# Altium PCB CAN_Optical.PcbDoc (part 2 of 2)
Units mm, origin at the board's own origin, x right, y up, seen from the top; angles counter-clockwise.
Board outline 152.4 x 127 mm, 4 copper layers (Top Layer, Power Plane, Ground Plane, Bottom Layer), stack 0.603 mm thick; 133 components, 52 nets, 740 pads, 182 vias.
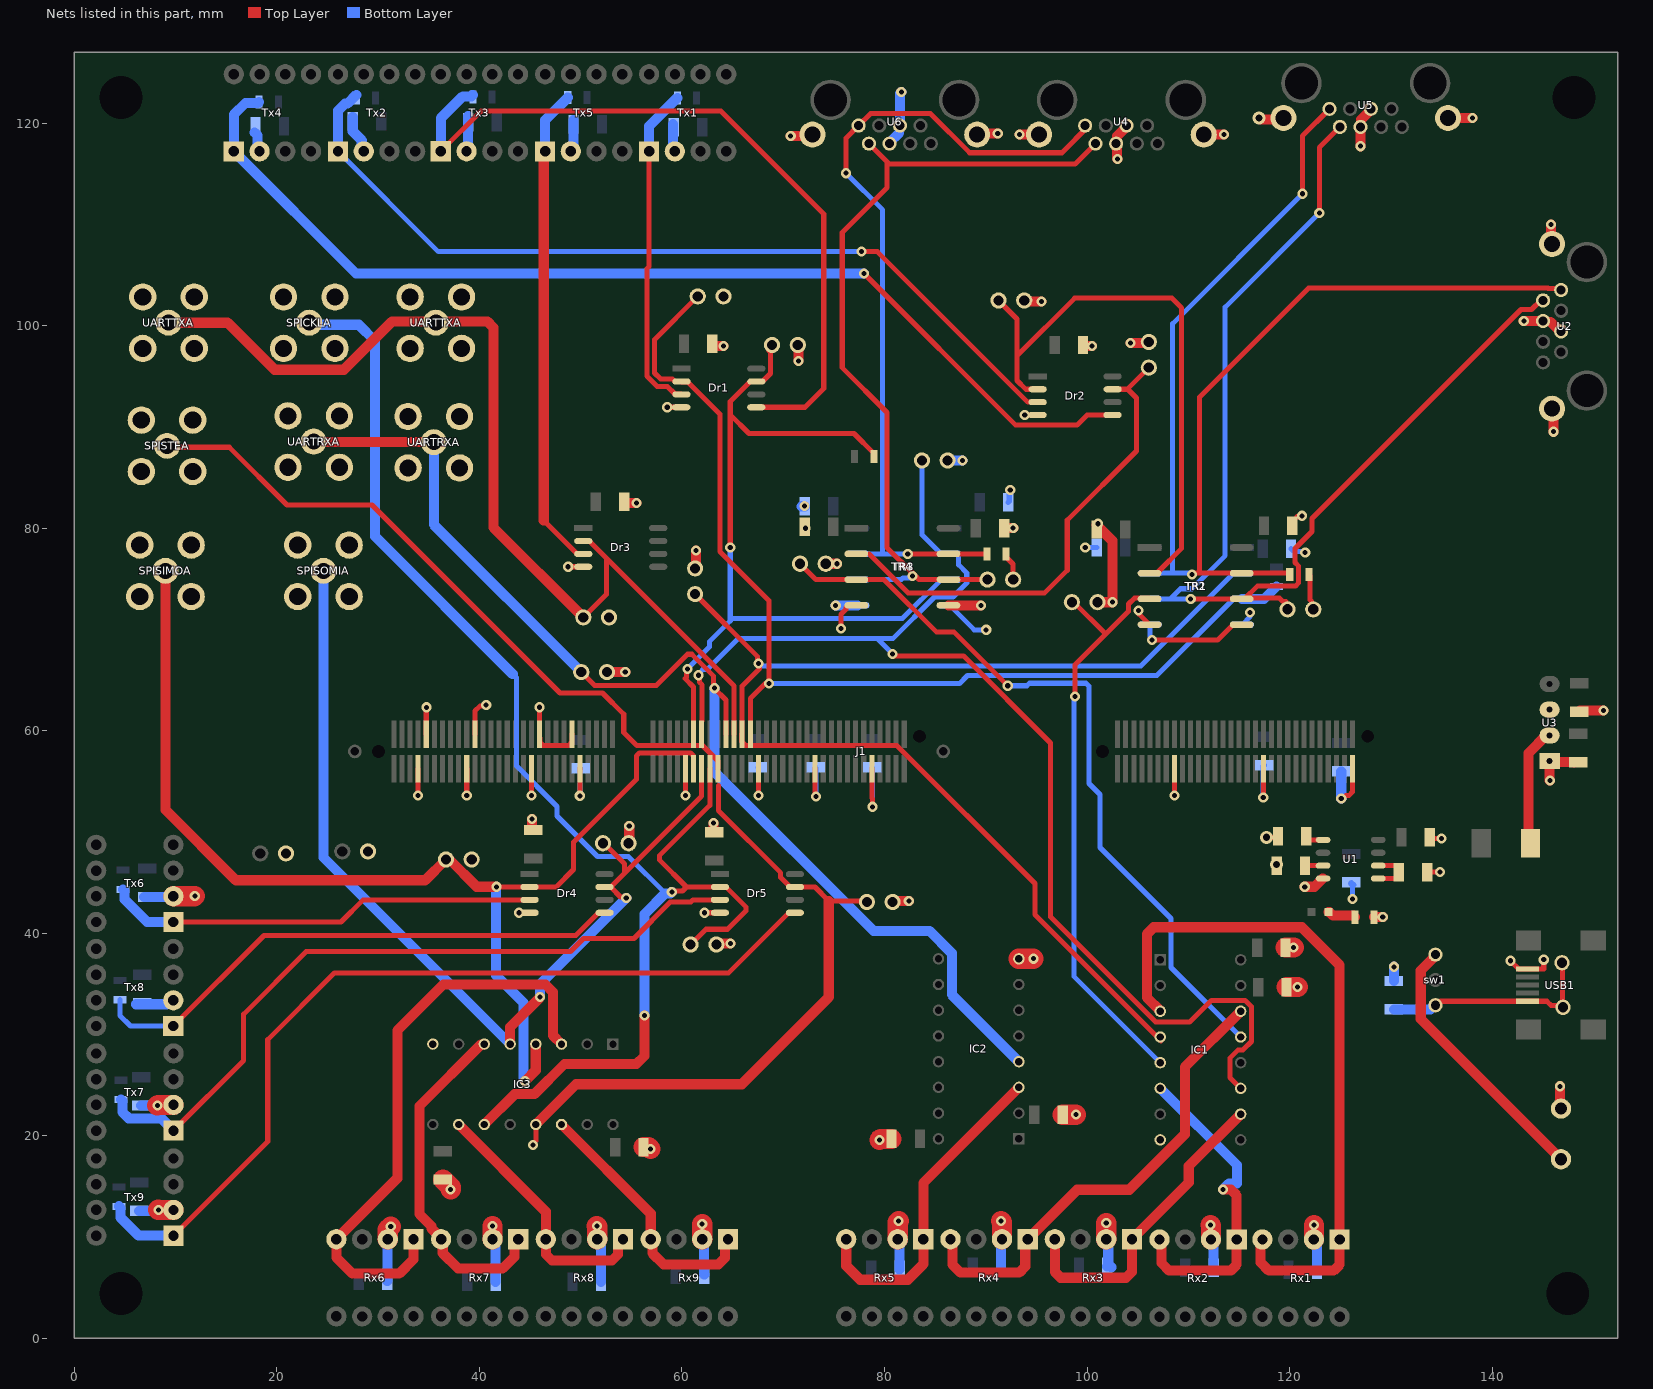
[diagram p4: the nets of this part, all layers, seen from the top]

## Via types
v1: diameter 1, hole 0.5, Top Layer to Bottom Layer, 179 vias
v2: diameter 1.27, hole 0.711, Top Layer to Bottom Layer, 3 vias

## Nets (pads, with @x,y where several pads share a name; then routed paths per layer and width w, separated by ;. In a path a pad name is that pad's centre, name@x,y a point inside that pad or via, vN(x,y) a via of type N, cw(c..) or ccw(c..) an arc to the next point about the centre after c; other vN are vias at no path point) (continued)
GND: C2.2 C4.2 C5.2 C6.2 C7.2 C8.2 C9.2 C10.2 C11.2 C12.2 C13.2 C14.2 C15.2 C16.2 C17.2 C19.2 C20.2 C21.2 C22.2 C23.2 C24.2 C26.2 C27.2 C28.2 C30.2 C31.2 C32.2 C33.2 C34.2 C35.2 C36.2 C37.2 C38.2 C39.2 C40.2 C41.2 C42.2 C43.2 C44.2 C45.2 C46.2 C47.2 C48.2 C49.2 C50.2 C51.2 CLKA.2 CON1.2 DACA.2 DACB.2 Dr1.4 Dr2.4 Dr3.4 Dr4.4 Dr5.4 IC1.8 IC2.8 IC3.8 J1.7 J1.10 J1.19 J1.22 J1.35 J1.38 J1.46 J1.47 J1.65 J1.83 J1.97 J1.111 J1.135 J1.157 J1.179 R2.1 Rx1.2 Rx2.2 Rx3.2 Rx4.2 Rx5.2 Rx6.2 Rx7.2 Rx8.2 Rx9.2 RXA.2 RXB.2 SHRXA.2 SHRXB.2 SHTXA.2 SHTXB.2 SIMO.2 SOMI.2 SPICKLA.2 SPISIMOA.2 SPISOMIA.2 SPISTEA.2 STEA.2 TR1.4 TR2.4 TR3.4 TR4.4 Tx1.2 Tx2.2 Tx3.2 Tx4.2 Tx5.2 Tx6.2 Tx7.2 Tx8.2 Tx9.2 TXA.2 TXB.2 U1.4 U3.1 UARTRXA.2 UARTTXA.2 USB1.5 | length 226
  Top Layer w0.5: v1(33.952,53.621) J1.7@33.952,56.261 ; J1.10@34.752,59.661 34.752,62.301 v1(34.776,62.325) ; Tx3.2@38.735,117.348 Tx3.2@38.74,117.343 ; v1(38.752,53.621) J1.19@38.752,56.261 ; J1.22@39.552,59.661 39.552,61.948 40.044,62.44 40.577,62.44 v1(40.672,62.536) ; v1(43.904,42.037) Dr4.4@44.958,42.037 ; v1(45.152,53.621) J1.35@45.152,56.261 ; v1(45.926,62.327) 45.952,62.301 J1.38@45.952,59.661 45.952,59.311 45.998,59.265 45.998,58.852 46.293,58.557 48.811,58.557 49.152,58.898 J1.46@49.152,59.661 ; v1(48.768,76.2) Dr3.4@50.258,76.2 ; v1(49.915,53.584) 49.952,53.621 J1.47@49.952,56.261 ; v1(58.547,91.948) Dr1.4@59.944,91.948 ; v1(60.352,53.621) J1.65@60.352,56.261 ; v1(62.23,42.037) Dr5.4@63.754,42.037 ; v1(67.552,53.621) J1.83@67.552,56.261 ; C28.2@72.136,80.137 72.009,80.01 72.2,79.819 v1(72.2,80) ; J1.97@73.152,56.261 73.152,53.737 73.254,53.635 v1(73.254,53.5) ; v1(75.692,70.104) 75.692,71.478 76.188,71.974 76.188,72.171 76.407,72.39 TR4.4@77.216,72.39 ; J1.111@78.752,56.261 78.752,53.348 78.8,53.3 v1(78.8,52.5) ; v1(93.853,91.186) Dr2.4@95.123,91.186 ; v1(105.1,71.9) 105.1,71.557 TR2.4@106.172,70.485 ; v1(108.62,53.621) J1.135@108.62,56.261 ; v1(117.4,53.4) 117.42,53.42 J1.157@117.42,56.261 ; v2(117.717,49.482) 118.73,49.482 C4.2@118.857,49.609 ; v1(125.1,53.3) 125.235,53.3 125.568,53.633 125.879,53.633 126.22,53.974 J1.179@126.22,56.261 ; C5.2@133.595,46.053 v1(134.862,46.053) ; C2.2@133.849,49.482 133.976,49.355 v1(134.989,49.355) ; v1(141.8,37.3) 142.6,36.5 USB1.5@143.5,36.5 145.1,36.5 v1(145.1,37.4)
  Top Layer w1: v1(45.2,51.3) 45.2,50.21 45.21,50.2 C45.2@45.3,50.2 ; UARTRXA.2@52.6,65.8 v1(54.4,65.8) ; C37.2@54.3,82.6 54.3,82.51 54.31,82.5 v1(55.5,82.5) ; SOMI.2@54.74,48.9 54.8,48.96 v1(54.8,50.6) ; RXA.2@61.3,76.04 61.4,76.14 v1(61.4,77.8) ; C21.2@63,98.2 63,98.01 63.01,98 v1(64.1,98) ; v1(63.1,50.9) 63.1,50.01 63.11,50 C46.2@63.2,50 ; CLKA.2@63.4,38.9 63.5,39 v1(64.8,39) ; TXB.2@71.44,98.1 71.5,98.04 v1(71.5,96.5) ; SHTXB.2@74.2,76.5 v1(75.3,76.5) ; STEA.2@80.8,43.1 80.9,43.2 v1(82.4,43.2) ; SHRXA.2@93.8,102.5 93.9,102.4 v1(95.5,102.4) ; C22.2@99.6,98.1 99.6,98.01 99.61,98 v1(100.5,98) ; C9.2@100.965,80.311 102.5,78.776 v1(102.5,72.7) SHTXA.2@101.04,72.7 ; v1(104.3,98.3) 106,98.3 SHRXB.2@106.1,98.4 ; v1(121.5,44.6) 122.462,44.6 123.28,45.418 U1.4@123.305,45.418 ; R2.1@128.35,41.6 v1(129.2,41.6) ; v1(145.7,55.1) 145.682,55.118 U3.1@145.682,57.01 145.782,56.91 148.09,56.91 C17.2@148.1,56.9 ; v1(146.7,24.9) 146.7,22.8 CON1.2@146.8,22.7
  Top Layer w2: v1(8.2,23) 8.265,23.065 Tx7.2@9.798,23.065 ; v1(8.3,12.7) 8.31,12.69 Tx9.2@9.798,12.69 ; Tx6.2@9.784,43.663 11.863,43.663 v1(11.9,43.7) ; Rx6.2@30.96,9.8 30.96,10.769 v1(31.245,11.055) ; C19.2@36.4,15.7 37.164,14.936 v1(37.164,14.7) ; Rx7.2@41.3,9.8 v1(41.3,11.1) ; v1(51.6,11.1) 51.64,11.06 Rx8.2@51.64,9.8 ; C20.2@56.2,18.9 56.7,18.9 v1(56.9,18.7) ; Rx9.2@62,9.8 v1(62,11.3) ; v1(79.5,19.6) 79.6,19.7 C38.2@80.7,19.7 ; Rx5.2@81.3,9.8 81.3,11.5 v1(81.4,11.6) ; v1(91.5,11.6) 91.6,11.5 Rx4.2@91.6,9.8 ; IC2.8@93.27,37.49 94.69,37.49 v1(94.7,37.5) ; C43.2@97.6,22.1 v1(98.9,22.1) ; Rx3.2@101.9,9.8 v1(101.9,11.4) ; v1(112.2,11.2) 112.235,11.165 Rx2.2@112.235,9.775 ; C30.2@119.6,38.6 v1(120.4,38.6) ; C31.2@119.7,34.7 v1(120.8,34.7) ; Rx1.2@122.4,9.775 v1(122.4,11.2)
  Bottom Layer w0.5: v1(49.915,53.584) 49.915,56.215 C39.2@50,56.3 ; C33.2@67.5,56.4 67.552,56.348 v1(67.552,53.621) ; C47.2@73.2,56.4 73.254,56.346 v1(73.254,53.5) ; v1(78.8,52.5) C35.2@78.8,56.4 ; TR3.4@86.443,72.39 88.856,69.977 v1(90.043,69.977) ; C27.2@92.205,82.55 92.323,82.668 92.323,83.694 v1(92.418,83.79) ; TR1.4@115.316,70.485 116.1,71.269 v1(116.1,71.7) ; v1(117.4,53.4) 117.4,56.5 C26.2@117.5,56.6 ; C6.2@120.145,77.978 120.145,77.973 120.405,77.713 121.423,77.713 v1(121.543,77.593) ; v1(126.2,43.4) C7.2@126.2,44.733 ; C7.2@126.2,44.734 126,44.935 C7.2@126.099,45.034 C7.2@126.353,44.78
  Bottom Layer w1: C49.2@6.1,33 9.122,33 9.508,33.386 Tx8.2@9.779,33.386 ; C50.2@6.4,12.6 6.41,12.59 8.19,12.59 v1(8.3,12.7) ; C42.2@6.6,23 6.61,23.01 8.19,23.01 v1(8.2,23) ; C41.2@6.9,43.6 C41.2@7.2,43.6 7.21,43.61 9.731,43.61 Tx6.2@9.784,43.663 ; v1@8.2,23.01 9.743,23.01 Tx7.2@9.798,23.065 ; v1@8.3,12.51 9.618,12.51 Tx9.2@9.798,12.69 ; C24.2@17.81,119.08 18.102,118.788 18.102,117.407 Tx4.2@18.293,117.216 ; C10.2@27.5,120.6 C10.2@27.5,120.2 27.5,119.19 28.389,118.301 28.389,117.407 Tx2.2@28.58,117.216 ; C36.2@30.9,5.7 30.91,5.71 30.91,9.75 Rx6.2@30.96,9.8 ; Tx3.2@38.735,117.221 38.89,117.376 38.89,120.69 C23.2@38.9,120.7 ; Rx7.2@41.3,9.8 41.3,9.529 41.6,9.229 C40.2@41.6,5.6 ; Tx5.2@49.027,117.216 49.027,117.487 49.3,117.76 C32.2@49.3,119.9 C32.2@49.3,120.3 ; Rx8.2@51.64,9.8 51.64,9.529 52,9.169 C44.2@52,5.6 ; C16.2@59.1,119.9 59.1,119.6 59.11,119.59 59.11,117.405 Tx1.2@59.299,117.216 ; Rx9.2@62,9.8 62.19,9.61 62.19,6.31 C48.2@62.2,6.3 ; Rx5.2@81.3,9.8 81.49,9.61 81.49,6.81 C34.2@81.5,6.8 ; RXB.2@86.24,86.7 v1(87.7,86.7) ; C14.2@91.5,7.1 91.51,7.11 91.51,9.71 Rx4.2@91.6,9.8 ; Rx3.2@101.9,9.8 102.091,9.609 102.091,7.338 102.4,7.029 102.4,7 102.3,7.1 C13.2@102,7.1 ; Rx2.2@112.235,9.775 112.235,9.504 112.49,9.249 112.49,7.01 C12.2@112.5,7 ; Rx1.2@122.4,9.775 122.4,9.504 122.694,9.21 122.694,6.806 C11.2@122.7,6.8 ; v1(125.1,53.3) C51.2@125.1,56 ; C15.2@130.3,35.3 v1(130.3,36.7)
  other v1: 101.1,80.446
  other v2: 118.7,46.8
GND/1: C1.2 C3.2 C18.2 C25.2 C29.2 TR1.5 TR2.5 TR3.5 TR4.5 U2.4 U2.5 U2.9 U3.3 U4.4 U4.5 U4.9 U5.4 U5.5 U5.9 U6.4 U6.5 U6.9 | length 56
  Top Layer w0.5: v1(106.426,68.961) 112.898,68.961 114.422,70.485 TR2.5@115.272,70.485 ; C3.2@120.272,80.264 120.272,80.664 120.746,81.138 121.129,81.138 v1(121.225,81.234)
  Top Layer w1: v1(70.739,118.745) 72.764,118.745 U6.9@72.892,118.873 ; TR4.5@86.316,72.39 v1(89.535,72.39) ; U6.9@89.152,118.873 89.278,118.999 v1(91.186,118.999) ; C29.2@91.824,80.01 v1(92.71,80.01) ; v1(93.345,118.872) 95.263,118.872 U4.9@95.264,118.871 ; U4.4@102.874,117.981 102.951,117.904 102.951,116.505 v1(102.997,116.459) ; 102.951,118.709 103.894,119.653 U4.5@103.894,119.761 ; U4.9@111.524,118.871 U4.9@111.524,118.871 v1(113.538,118.872) ; v2(116.967,120.523) 117.04,120.523 117.189,120.374 119.246,120.374 U5.9@119.394,120.522 ; v1(127,117.729) 127,119.628 U5.4@127.004,119.632 ; 127.081,120.36 128.024,121.304 U5.5@128.024,121.412 ; U5.9@135.654,120.522 U5.9@135.654,120.522 v1(138.049,120.523) ; v1(143.129,100.457) 145.028,100.457 U2.4@145.032,100.461 ; 145.76,100.384 146.704,99.441 U2.5@146.812,99.441 ; v1(145.796,109.982) 145.796,108.197 U2.9@145.922,108.071 ; U2.9@145.922,91.811 146.05,91.683 v1(146.05,89.535) ; C18.2@148.6,61.9 148.7,62 v1(151,62)
  Bottom Layer w0.5: v1(99.822,78.105) C1.2@100.959,78.105 ; TR1.5@105.337,70.416 105.407,70.485 TR1.5@106.216,70.485 106.216,69.306 106.426,69.096 v1(106.426,68.961)
  Bottom Layer w1: v1(72.1,82.2) 71.862,82.2 71.831,82.169 C25.2@72.13,82.169 ; v1(75.184,72.39) TR3.5@77.343,72.39 ; U6.4@80.502,117.983 80.502,118.091 81.445,119.035 ; U6.5@81.522,119.763 81.522,122.924 v1(81.661,123.063)
NetC4_1: C4.1 U1.1 | length 1.9
  Top Layer w0.5: C4.1@121.657,49.609 121.657,49.488 121.917,49.228 U1.1@123.305,49.228
NetC5_1: C5.1 U1.5 U1.6 | length 5
  Top Layer w0.5: U1.5@128.755,45.418 130.535,45.418 130.795,45.678 C5.1@130.795,46.053 130.795,46.428 130.535,46.688 U1.6@128.755,46.688
NetC8_1: C8.1 U1.3 | length 1.8
  Top Layer w0.5: C8.1@121.53,46.688 U1.3@123.305,46.688
NetC15_1: C15.1 sw1.3 USB1.1 | length 21.7
  Top Layer w0.5: sw1.3@134.4,32.9 134.508,32.9 134.908,33.3 USB1.1@143.5,33.3 145.4,33.3 145.804,32.896 146.804,32.896 USB1.1@146.95,32.75 ; USB1.1@146.9,37.1 146.95,37.05 USB1.1@146.95,32.75 ; USB1.1@147,32.7 USB1.1@146.95,32.75
  Bottom Layer w1: C15.1@130.3,32.5 133.892,32.5 134.292,32.9 sw1.3@134.4,32.9
NetD1_1: D1.1 R2.2 | length 2.8
  Top Layer w1: D1.1@123.825,42.1 123.95,42.1 124.3,41.75 126.3,41.75 R2.2@126.45,41.6
NetDr1_3: Dr1.3 R4.2 Tx1.1 | length 32.9
  Top Layer w0.5: Tx1.1@56.759,117.216 56.759,105.86 56.535,105.636 56.535,95.03 57.565,94 58.562,94 59.311,93.251 59.911,93.251 Dr1.3@59.944,93.218
  Bottom Layer w1: Tx1.1@56.759,117.216 56.766,117.223 56.766,119.716 R4.2@59.55,122.5
NetDr1_5: Dr1.5 R6.2 Tx3.1 | length 75.7
  Top Layer w0.5: Tx3.1@36.195,117.221 40.174,121.2 63.839,121.2 74,111.039 74,93.8 72.148,91.948 Dr1.5@67.344,91.948
  Bottom Layer w1: Tx3.1@36.195,117.221 36.195,120.481 38.364,122.65 39.2,122.65 R6.2@39.35,122.8
NetDr2_3: Dr2.3 R5.2 Tx2.1 | length 85.8
  Top Layer w0.5: v1(77.724,107.315) 79.299,107.315 94.158,92.456 Dr2.3@95.123,92.456
  Bottom Layer w0.5: Tx2.1@26.04,117.216 35.941,107.315 v1(77.724,107.315)
  Bottom Layer w1: Tx2.1@26.04,117.216 26.04,121.226 26.757,121.943 26.993,121.943 R5.2@27.85,122.8
NetDr2_5: Dr2.5 R7.2 Tx4.1 | length 105
  Top Layer w0.5: v1(77.978,105.156) 92.952,90.182 99.014,90.182 100.018,91.186 Dr2.5@102.523,91.186
  Bottom Layer w1: R7.2@18.25,122.1 18.15,122 16.9,122 15.753,120.853 Tx4.1@15.753,117.216 27.813,105.156 v1(77.978,105.156)
NetDr3_3: Dr3.3 R10.2 Tx5.1 | length 48
  Top Layer w0.5: 46.355,80.773 49.658,77.47 Dr3.3@50.258,77.47 ; Tx5.1@46.355,117.084 Tx5.1@46.487,117.216
  Top Layer w1: 46.355,80.773 Tx5.1@46.355,117.084
  Bottom Layer w1: Tx5.1@46.487,117.216 46.487,120.287 R10.2@48.725,122.525
NetDr4_3: Dr4.3 R11.2 Tx6.1 | length 42.9
  Top Layer w0.5: Tx6.1@9.784,41.123 26.34,41.123 28.524,43.307 Dr4.3@44.958,43.307
  Bottom Layer w1: R11.2@4.8,44.35 4.95,44.2 4.95,43.364 7.191,41.123 Tx6.1@9.784,41.123
NetDr4_5: Dr4.5 R13.2 Tx8.1 | length 54.5
  Top Layer w0.5: Tx8.1@9.779,30.846 18.733,39.8 49.521,39.8 51.758,42.037 Dr4.5@52.358,42.037
  Bottom Layer w0.5: R13.2@4.5,33.45 4.5,31.9 5.554,30.846 Tx8.1@9.779,30.846
NetDr5_3: Dr5.3 R12.2 Tx7.1 | length 73.2
  Top Layer w0.5: Tx7.1@9.798,20.525 16.724,27.451 16.724,32.024 22.9,38.2 48.987,38.2 50.287,39.5 55.26,39.5 58.849,43.089 60.869,43.089 61.087,43.307 Dr5.3@63.754,43.307
  Bottom Layer w1: R12.2@4.6,23.6 4.75,23.45 4.75,22.364 5.378,21.736 8.587,21.736 Tx7.1@9.798,20.525
NetDr5_5: Dr5.5 R14.2 Tx9.1 | length 87.6
  Top Layer w0.5: Tx9.1@9.798,10.15 19.1,19.452 19.1,29.5 25.7,36.1 64.617,36.1 70.554,42.037 Dr5.5@71.154,42.037
  Bottom Layer w1: R14.2@4.4,13.05 4.55,12.9 4.55,11.964 6.364,10.15 Tx9.1@9.798,10.15
NetL1_2: L1.2 U3.2 | length 10.9
  Top Layer w1: L1.2@143.6,49.687 143.6,57.794 145.356,59.55 U3.2@145.682,59.55
NetR3_1: R3.1 TR1.7 TR2.7 U2.1 U5.1 | length 123.8
  Top Layer w0.5: v1(110.363,75.438) 110.498,75.438 110.625,75.565 111.125,75.565 ; R3.1@120.015,75.438 120.015,75.465 119.915,75.565 TR2.7@115.272,75.565 111.125,75.565 ; v1(121.285,113.03) 121.285,118.753 U5.1@123.944,121.412 ; U2.1@146.812,103.521 146.64,103.693 145.543,103.693 145.531,103.705 121.866,103.705 111.125,92.964 111.125,75.565
  Bottom Layer w0.5: TR1.7@106.216,75.565 108.458,75.565 ; v1(110.363,75.438) 110.228,75.438 110.101,75.565 108.458,75.565 ; v1(121.285,113.03) 108.458,100.203 108.458,75.565
NetR3_2: R3.2 tp5.2 | length 2.8
  Top Layer w0.5: R3.2@121.915,75.438 122.015,75.338 122.015,72.93 tp5.2@122.174,72.771
NetR9_1: R9.1 TR3.7 TR4.7 U4.1 U6.1 | length 83.4
  Top Layer w0.5: v1(76.2,115.062) 76.2,118.521 U6.1@77.442,119.763 78.646,120.967 84.528,120.967 88.413,117.082 97.524,117.082 100.203,119.761 U4.1@99.814,119.761 ; v1(82.296,77.47) TR4.7@86.316,77.47 R9.1@90.109,77.47
  Bottom Layer w0.5: v1(76.2,115.062) 79.819,111.442 79.819,77.47 ; TR3.7@77.343,77.47 79.819,77.47 ; v1(82.296,77.47) 79.819,77.47
NetR9_2: R9.2 tp10.2 | length 2.8
  Top Layer w0.5: R9.2@92.009,77.47 92.009,77.17 92.699,76.48 92.699,74.941 tp10.2@92.71,74.93
Nettp5_1: tp5.1 TR1.6 TR2.6 U2.2 U5.2 | length 112.7
  Top Layer w0.5: v1(110.236,73.025) TR2.6@115.272,73.025 TR2.6@115.556,73.025 ; tp5.1@119.634,72.771 119.336,72.771 119.003,73.104 115.635,73.104 TR2.6@115.556,73.025 ; v1(122.936,111.125) 122.936,117.604 U5.2@124.964,119.632 ; U2.2@145.032,102.501 144.788,102.501 143.888,101.601 142.853,101.601 122.214,80.962 122.214,79.683 120.539,78.008 120.539,76.626 120.869,76.297 120.869,74.579 120.574,74.284 116.815,74.284 TR2.6@115.556,73.025
  Bottom Layer w0.5: TR1.6@106.216,73.025 108.226,73.025 ; v1(110.236,73.025) 108.226,73.025 ; v1(122.936,111.125) 113.637,101.826 113.637,77.292 110.374,74.029 109.23,74.029 108.226,73.025
Nettp10_1: tp10.1 TR3.6 TR4.6 U4.2 U6.2 | length 83.2
  Top Layer w0.5: U6.2@78.462,117.983 80.257,116.188 ; v1(82.757,75.283) 82.852,75.188 83.159,75.188 83.262,75.084 ; tp10.1@90.17,74.93 TR4.6@86.316,74.93 83.416,74.93 82.91,75.436 80.257,78.089 80.257,91.429 75.827,95.859 75.827,109.198 80.257,113.628 80.257,115.951 80.257,116.188 ; U4.2@100.834,117.981 98.804,115.951 80.494,115.951 80.257,116.188
  Bottom Layer w0.5: TR3.6@77.343,74.93 81.653,74.93 81.807,75.084 82.558,75.084 v1(82.757,75.283)
RXA: IC1.4 J1.80 RXA.1 TR1.2 | length 125.4
  Top Layer w0.5: RXA.1@61.3,73.5 67.48,67.32 67.48,66.759 v1(67.576,66.663) 67.672,66.567 67.672,66.153 67.674,66.15 65.952,64.428 J1.80@65.952,59.661 ; J1.80@65.906,59.7 65.906,58.944 66.293,58.557 81.219,58.557 94.855,44.92 94.855,41.845 107.3,29.4 107.3,29.7 IC1.4@107.23,29.77
  Bottom Layer w0.5: v1(67.576,66.663) 67.711,66.663 67.953,66.421 105.322,66.421 114.466,75.565 TR1.2@115.316,75.565
RXA5V: IC1.3 Rx1.1 Rx1.4 | length 69.3
  Top Layer w1: IC1.3@107.23,32.31 107.23,32.345 105.911,33.664 105.911,39.925 106.586,40.6 121.2,40.6 124.94,36.86 Rx1.1@124.94,9.775 124.94,7.286 124.354,6.7 117.957,6.7 117.129,7.529 117.129,9.584 Rx1.4@117.32,9.775
RXB: IC1.11 J1.70 RXB.1 TR3.2 | length 123.4
  Top Layer w0.5: v1(61.623,65.489) 61.719,65.393 61.719,64.824 61.998,64.544 J1.70@61.998,60.96 ; v1(80.8,67.6) 81,67.4 87.8,67.4 96.4,58.8 96.4,41.628 106.787,31.241 110.131,31.241 112.269,33.379 115.613,33.379 116.239,32.753 116.239,29.327 115.412,28.5 114.928,28.5 114.101,27.673 114.101,25.759 IC1.11@115.17,24.69
  Bottom Layer w0.5: v1(61.623,65.489) 61.623,65.613 62.05,66.04 62.484,66.04 65.544,69.1 79.3,69.1 ; v1(80.8,67.6) 79.3,69.1 ; RXB.1@83.7,86.7 83.7,79.363 85.593,77.47 TR3.2@86.443,77.47 87.251,77.47 87.321,77.401 87.321,76.395 88.122,75.594 88.122,74.587 86.754,73.219 84.948,73.219 80.829,69.1 79.3,69.1
RXB5V: IC1.10 Rx3.1 Rx3.4 | length 31.3
  Top Layer w1: Rx3.4@96.82,9.8 96.82,6.586 97.406,6 103.854,6 104.44,6.586 Rx3.1@104.44,9.8 110.043,15.403 110.043,17.023 IC1.10@115.17,22.15
SHRXA: Dr2.2 SHRXA.1 TR2.2 | length 58
  Top Layer w0.5: SHRXA.1@91.26,102.5 93.096,100.664 93.096,97.029 ; Dr2.2@95.123,93.726 93.954,93.726 93.096,94.584 93.096,97.029 ; TR2.2@106.172,75.565 106.981,75.565 107.051,75.634 107.051,75.731 109.347,78.027 109.347,101.753 108.379,102.721 98.788,102.721 93.096,97.029
SHRXB: Dr2.7 SHRXB.1 TR4.2 | length 49.1
  Top Layer w0.5: 78.486,77.47 82.33,73.626 95.812,73.626 98.044,75.858 98.044,80.795 104.89,87.641 104.89,92.872 104.055,93.707 102.542,93.707 Dr2.7@102.523,93.726 103.966,93.726 SHRXB.1@106.1,95.86
SHTXA: IC1.5 SHTXA.1 TR2.3 | length 58.1
  Top Layer w0.5: SHTXA.1@98.5,72.7 98.7,72.7 101.848,69.551 ; v1(98.8,63.4) 98.8,66.503 101.848,69.551 ; TR2.3@106.172,73.025 106.093,73.104 104.684,73.104 104.096,72.516 104.096,71.799 101.848,69.551
  Bottom Layer w0.5: v1(98.8,63.4) 98.7,63.3 98.7,35.76 IC1.5@107.23,27.23
SHTXA5V: IC1.6 Rx2.1 Rx2.4 | length 33
  Top Layer w1: Rx2.4@107.155,9.775 107.346,9.584 107.346,7.454 108.1,6.7 114.189,6.7 114.775,7.286 Rx2.1@114.775,9.775 114.775,14.128 114.189,14.713 v1(113.416,14.713)
  Bottom Layer w1: IC1.6@107.23,24.69 114.8,17.12 114.8,15.299 114.002,15.299 v1(113.416,14.713)
SHTXB: IC1.13 SHTXB.1 TR4.3 | length 74.6
  Top Layer w0.5: SHTXB.1@71.66,76.5 73.23,74.93 TR4.3@77.216,74.93 79.96,74.93 85.152,69.738 86.882,69.738 v1(92.17,64.45)
  Bottom Layer w0.5: v1(92.17,64.45) 94.05,64.45 94.3,64.7 99.907,64.7 100.2,64.407 100.2,54.805 101.284,53.721 101.284,48.482 108.299,41.468 108.299,36.641 IC1.13@115.17,29.77
SHTXB5V: IC1.14 Rx4.1 Rx4.4 | length 47.4
  Top Layer w1: Rx4.4@86.52,9.8 86.7,9.62 86.7,7.3 87.5,6.5 93.3,6.5 93.9,7.1 93.9,9.56 Rx4.1@94.14,9.8 99.022,14.682 104.167,14.682 109.656,20.171 109.656,26.796 IC1.14@115.17,32.31
SPICLKA: CLKA.1 Dr5.2 IC3.11 J1.71 SPICKLA.1 | length 142.1
  Top Layer w0.5: v1(59,44.093) 59.096,44.189 60.064,44.189 60.452,44.577 ; CLKA.1@60.86,38.9 62.367,40.407 64.507,40.407 66.308,42.208 66.308,42.623 64.387,44.544 63.787,44.544 Dr5.2@63.754,44.577 60.452,44.577 ; J1.71@62.752,56.261 62.752,52.652 57.772,47.672 57.772,47.257 60.452,44.577
  Top Layer w1: IC3.11@40.49,21.13 43.487,24.127 45.427,24.127 48.4,27.1 55.5,27.1 56.3,27.9 v1(56.3,31.9)
  Bottom Layer w0.5: 43.3,65.6 43.654,65.246 43.654,56.539 47.657,52.536 47.657,51.599 51.66,47.596 54.704,47.596 58.35,43.95
  Bottom Layer w1: SPICKLA.1@23.2,100.3 23.4,100.1 28.1,100.1 29.7,98.5 29.7,79.2 43.3,65.6 ; v1(56.3,31.9) 56.3,41.9 58.35,43.95 58.857,43.95 v1(59,44.093)
SPICLKA5V: IC3.10 Rx8.1 Rx8.4 | length 26
  Top Layer w1: IC3.10@37.95,21.13 46.56,12.52 Rx8.4@46.56,9.529 ; Rx8.4@46.56,9.8 46.581,9.779 46.581,8.286 47.167,7.7 53.094,7.7 53.68,8.286 53.68,9.3 Rx8.1@54.18,9.8
SPISIMOA: Dr4.2 IC3.4 J1.67 SIMO.1 SPISIMOA.1 | length 114.9
  Top Layer w0.5: v1(41.7,44.6) 41.711,44.589 44.946,44.589 Dr4.2@44.958,44.577 47.577,44.577 49.3,46.3 49.3,49 55.5,55.2 55.5,57.507 55.793,57.8 60.859,57.8 61.152,57.507 J1.67@61.152,56.261
  Top Layer w1: SPISIMOA.1@9,75.8 9,52.2 15.954,45.246 34.646,45.246 SIMO.1@36.7,47.3 37.042,47.3 39.742,44.6 v1(41.7,44.6) ; v1(44.5,25.4) 45.57,26.47 IC3.4@45.57,29.07
  Bottom Layer w1: v1(41.7,44.6) 41.646,44.546 41.646,35.854 44.349,33.151 44.349,25.551 v1(44.5,25.4)
SPISIMOA5V: IC3.3 Rx6.1 Rx6.4 | length 58.8
  Top Layer w1: Rx6.1@33.5,9.8 33.5,7.822 32.078,6.4 27.466,6.4 25.88,7.986 Rx6.4@25.88,9.8 31.9,15.82 31.9,30.414 36.44,34.954 46.519,34.954 47.254,34.219 47.254,29.926 IC3.3@48.11,29.07
SPISOMIA: Dr4.7 IC3.5 J1.69 SOMI.1 SPISOMIA.1 | length 95.3
  Top Layer w0.5: SOMI.1@52.302,48.898 54.344,46.856 54.344,45.963 ; Dr4.7@52.358,44.577 Dr4.7@52.958,44.577 ; v1(54.5,43.5) 54.404,43.596 53.939,43.596 Dr4.7@52.958,44.577 ; J1.69@61.952,56.261 61.952,53.571 54.344,45.963 ; Dr4.7@52.958,44.577 54.344,45.963
  Top Layer w1: IC3.5@43.03,29.07 43.03,30.73 v1(46,33.7)
  Bottom Layer w1: SPISOMIA.1@24.6,75.8 24.6,47.5 IC3.5@43.03,29.07 ; v1(46,33.7) 46,35 v1(54.5,43.5)
SPISOMIA5V: IC3.6 Rx7.1 Rx7.4 | length 34.5
  Top Layer w1: IC3.6@40.49,29.07 40.465,29.045 40.175,29.045 34.091,22.961 34.091,12.275 35.254,11.112 35.254,10.886 36.22,9.92 Rx7.4@36.22,9.8 36.378,9.642 36.378,8.422 37.9,6.9 42.3,6.9 43.459,8.059 43.459,9.419 Rx7.1@43.84,9.8
SPISTEA: Dr5.7 IC3.13 J1.73 SPISTEA.1 STEA.1 | length 136.1
  Top Layer w0.5: SPISTEA.1@9.16,88.14 9.3,88 15.3,88 21,82.3 29.4,82.3 47.958,63.742 52.158,63.742 54.255,61.644 54.255,59.845 55.546,58.554 62.022,58.554 63.552,57.024 J1.73@63.552,56.261 ; v1(45.3,19.1) 45.3,19.235 45.57,19.505 IC3.13@45.57,21.13 ; 63.598,54.61 63.598,52.133 69.75,45.981 69.75,45.514 70.535,44.729 70.535,44.623 70.581,44.577 Dr5.7@71.154,44.577 73.129,44.577 74.5,43.206 74.5,43.2 78.16,43.2 STEA.1@78.26,43.1
  Top Layer w1: IC3.13@45.57,21.13 49.54,25.1 65.9,25.1 74.5,33.7 74.5,43.2
SPISTEA5V: IC3.14 Rx9.1 Rx9.4 | length 26.3
  Top Layer w1: IC3.14@48.11,21.13 56.92,12.32 Rx9.4@56.92,9.8 57.078,9.642 57.078,8.422 58.2,7.3 63.6,7.3 64.259,7.959 64.259,9.519 Rx9.1@64.54,9.8
TXA: Dr1.2 J1.82 R1.2 TR1.3 TXA.1 | length 106.2
  Top Layer w0.5: TXA.1@61.56,102.9 57.289,98.629 57.289,95.342 57.877,94.754 59.051,94.754 59.317,94.488 Dr1.2@59.944,94.488 59.977,94.455 60.577,94.455 63.766,91.266 63.766,77.689 68.58,72.875 v1(68.58,64.655) 68.211,64.655 66.752,63.196 J1.82@66.752,59.661
  Bottom Layer w0.5: v1(68.58,64.655) 87.406,64.655 88.205,65.454 106.895,65.454 114.466,73.025 TR1.3@115.316,73.025
  Bottom Layer w1: TR1.3@115.316,73.025 117.475,73.025 R1.2@118.7,74.25
TXB: Dr1.7 J1.68 R8.2 TR3.3 TXB.1 | length 82.6
  Top Layer w0.5: v1(60.539,66.119) 60.443,66.023 60.443,65.269 60.325,65.151 61.152,64.324 J1.68@61.152,59.661 ; v1(64.77,78.105) 64.77,91.2 ; TXB.1@68.4,98.2 68.61,97.99 68.61,97.495 68.748,97.357 68.748,95.292 67.944,94.488 Dr1.7@67.344,94.488 66.744,94.488 64.77,92.514 64.77,91.2 ; R8.2@78.95,87.1 78.95,87.4 77,89.35 66.62,89.35 64.77,91.2
  Bottom Layer w0.5: v1(60.539,66.119) 62.702,68.282 62.702,68.798 64.77,70.866 ; v1(64.77,78.105) 64.77,70.866 ; TR3.3@86.443,74.93 85.593,74.93 81.771,71.108 65.012,71.108 64.77,70.866
UARTRXA: IC2.4 J1.76 UARTRXA.1 | length 115.2
  Top Layer w0.5: UARTRXA.1@50.06,65.8 51.364,64.496 57.496,64.496 60.559,67.559 60.973,67.559 63.104,65.427 63.104,64.305 v1(63.2,64.209) ; v1@63.2,64.2 64.352,63.048 J1.76@64.352,59.661
  Top Layer w1: UARTRXA.1@23.64,88.56 23.67,88.53 35.47,88.53 UARTRXA.1@35.5,88.5
  Bottom Layer w1: UARTRXA.1@35.5,88.5 35.5,80.36 UARTRXA.1@50.06,65.8 ; v1(63.2,64.209) 63.2,55.962 78.916,40.246 84.439,40.246 86.649,38.036 86.649,33.951 IC2.4@93.27,27.33
UARTRXA5V: IC2.3 Rx5.1 Rx5.4 | length 32.8
  Top Layer w1: Rx5.4@76.22,9.8 76.22,7.18 77.6,5.8 82.3,5.8 83.84,7.34 Rx5.1@83.84,9.8 83.84,15.36 IC2.3@93.27,24.79
UARTTXA: Dr3.2 J1.78 UARTTXA.1 | length 101
  Top Layer w0.5: Dr3.2@50.258,78.74 50.858,78.74 52.549,77.049 ; UARTTXA.1@50.26,71.2 52.549,73.489 52.549,75.2 52.549,77.049 ; J1.78@65.152,59.661 65.152,61.681 65.151,61.682 65.151,64.447 52.549,77.049
  Top Layer w1: UARTTXA.1@9.3,100.3 15.144,100.3 19.788,95.656 26.612,95.656 31.356,100.4 35.6,100.4 UARTTXA.1@35.7,100.3 35.8,100.4 40.814,100.4 41.4,99.814 41.4,80.06 UARTTXA.1@50.26,71.2
VCC: CON1.1 sw1.1 | length 26.5
  Top Layer w1: sw1.1@134.4,37.9 134.4,37.792 132.946,36.338 132.946,31.554 CON1.1@146.8,17.7
pads on no net: Dr3.5 Dr3.6 Dr3.7 IC1.12 IC2.5 IC2.6 IC2.7 IC2.9 IC2.10 IC2.11 IC2.12 IC2.13 IC2.14 IC2.15 IC3.12 J1.1 J1.2 J1.3 J1.4 J1.5 J1.6 J1.8 J1.12 J1.13 J1.14 J1.15 J1.16 J1.17 J1.18 J1.20 J1.21 J1.23 J1.24 J1.25 J1.26 J1.27 J1.28 J1.29 J1.30 J1.31 J1.32 J1.33 J1.34 J1.36 J1.37 J1.39 J1.40 J1.41 J1.42 J1.43 J1.44 J1.45 J1.49 J1.50 J1.51 J1.52 J1.53 J1.54 J1.55 J1.56 J1.57 J1.58 J1.59 J1.60 J1.61 J1.62 J1.63 J1.64 J1.66 J1.72 J1.74 J1.75 J1.77 J1.79 J1.81 J1.85 J1.86 J1.87 J1.88 J1.89 J1.90 J1.91 J1.92 J1.93 J1.94 J1.95 J1.96 J1.99 J1.100 J1.101 J1.102 J1.103 J1.104 J1.105 J1.106 J1.107 J1.108 J1.109 J1.110 J1.113 J1.114 J1.115 J1.116 J1.117 J1.118 J1.119 J1.120 J1.121 J1.122 J1.123 J1.124 J1.125 J1.126 J1.127 J1.128 J1.129 J1.130 J1.131 J1.132 J1.133 J1.134 J1.136 J1.137 J1.138 J1.139 J1.140 J1.141 J1.142 J1.143 J1.144 J1.145 J1.146 J1.147 J1.148 J1.149 J1.150 J1.151 J1.152 J1.153 J1.154 J1.155 J1.156 J1.159 J1.160 J1.161 J1.162 J1.163 J1.164 J1.165 J1.166 J1.167 J1.168 J1.169 J1.170 J1.171 J1.172 J1.173 J1.174 J1.175 J1.176 J1.177 J1.178 J1.181 J1.182 J1.183 J1.184 J1.185 J1.186 Rx1.5 Rx1.6 Rx1.7 Rx1.8 Rx2.5 Rx2.6 Rx2.7 Rx2.8 Rx3.5 Rx3.6 Rx3.7 Rx3.8 Rx4.5 Rx4.6 Rx4.7 Rx4.8 Rx5.5 Rx5.6 Rx5.7 Rx5.8 Rx6.5 Rx6.6 Rx6.7 Rx6.8 Rx7.5 Rx7.6 Rx7.7 Rx7.8 Rx8.5 Rx8.6 Rx8.7 Rx8.8 Rx9.5 Rx9.6 Rx9.7 Rx9.8 Tx1.3 Tx1.4 Tx1.5 Tx1.6 Tx1.7 Tx1.8 Tx2.3 Tx2.4 Tx2.5 Tx2.6 Tx2.7 Tx2.8 Tx3.3 Tx3.4 Tx3.5 Tx3.6 Tx3.7 Tx3.8 Tx4.3 Tx4.4 Tx4.5 Tx4.6 Tx4.7 Tx4.8 Tx5.3 Tx5.4 Tx5.5 Tx5.6 Tx5.7 Tx5.8 Tx6.3 Tx6.4 Tx6.5 Tx6.6 Tx6.7 Tx6.8 Tx7.3 Tx7.4 Tx7.5 Tx7.6 Tx7.7 Tx7.8 Tx8.3 Tx8.4 Tx8.5 Tx8.6 Tx8.7 Tx8.8 Tx9.3 Tx9.4 Tx9.5 Tx9.6 Tx9.7 Tx9.8 U2.3 U2.6 U2.7 U2.8 U2.10 U4.3 U4.6 U4.7 U4.8 U4.10 U5.3 U5.6 U5.7 U5.8 U5.10 U6.3 U6.6 U6.7 U6.8 U6.10 USB1.2 USB1.3 USB1.4 USB1.6 USB1.7 USB1.8 USB1.9

## Polygon pours and split planes (outlines as drawn)
GND on Ground Plane "GND_L03_P025" (solid, pour order 25): 76.3,84.9 75.3,83.9 75.3,80.6 73.4,80.6 71.6,78.8 73.1,77.3 73.1,75.7 83.3,75.7 86.3,78.7 86.3,83.4 91.9,83.4 93.3,84.8 93.3,85.8 92.9,85.8 89,89.7 87.2,87.9 75.5,87.9 75.5,85.7
GND on Ground Plane "GND_L03_P024" (solid, pour order 24): 96.2,69.4 98.5,69.4 103.3,74.2 103.3,80 100.2,80 100,80.2 100,82.3 102.7,82.3 104.9,80.1 117.6,80.1 119.8,77.9 119.9,78 122,78 123.3,76.7 123.3,73.5 124.5,72.3 123.4,71.2 103.5,71.2 102.6,72.1 98.1,67.6 95.5,67.6 95.5,68.7
GND on Ground Plane "GND_L03_P022" (solid, pour order 22): 0.8,126.6 1.7,125.7 66.6,125.7 66.6,112.5 69.1,110 135.7,110 135.7,87.9 137,86.6 135.4,85 66.5,85 66.5,71.6 68.5,69.6 69.7,70.8 95,70.8 101,64.8 134.3,64.8 142.9,56.2 151.7,56.2 151.7,2.3 150.4,1 150.3,1.1 1.7,1.1 1.7,125.3 0.9,126.1
GND/1 on Ground Plane "GND/1_L03_P021" (solid, pour order 21): 73.5,73.5 73.5,74.6 73.7,74.8 73.9,74.6 88.7,74.6 88.7,72.608 88.174,73.134 73.866,73.134
GND/1 on Ground Plane "GND/1_L03_P020" (solid, pour order 20): 129,66.4 133.7,66.4 142.1,58 142.5,58.4 151.9,58.4 151.9,64.6 148.3,68.2 127.5,68.2 126.9,67.6
GND/1 on Ground Plane "GND/1_L03_P019" (solid, pour order 19): 121.5,83.9 121.5,80.4 127.1,74.8 127.1,68.7 134.7,68.7 128.3,75.1 128.3,82.9 123.094,82.9 122.047,83.947 122,83.9
GND/1 on Ground Plane "GND/1_L03_P018" (solid, pour order 18): 95.2,73.7 95.2,83.4 95.6,83.8 98.3,83.8 98.3,75.1 96.8,73.6 95.3,73.6
no net on Ground Plane "NONET_L03_P017" (solid, pour order 17): 129.3,86.2
GND/1 on Ground Plane "GND/1_L03_P014" (solid, pour order 14): 114.427,124.333 114.427,115.189 114.427,117.221 117.094,116.586 119.761,116.586 119.761,123.825 118.872,124.714 118.491,124.333
GND/1 on Ground Plane "GND/1_L03_P002" (solid, pour order 2): 115.824,125.73 115.824,117.602 117.475,115.951 133.858,115.951 139.065,110.744 139.065,88.519 145.542,82.042 145.542,74.549 140.589,69.596 102.235,69.596 99.822,67.183 100.965,66.04 146.685,66.04 151.765,71.12 151.765,116.84 150.241,116.84 141.097,125.984 115.697,125.984 115.951,125.73
GND/1 on Ground Plane "GND/1_L03_P009" (solid, pour order 9): 88.265,71.247 96.266,71.247 96.647,71.628 96.647,81.407 96.52,81.28 91.059,81.28 91.059,79.248 90.932,79.121 91.059,78.994 93.98,78.994 93.98,73.787 94.361,73.406 88.265,73.406
GND/1 on Ground Plane "GND/1_L03_P006" (solid, pour order 6): 120.015,79.375 122.682,79.375 122.682,83.312 122.047,83.947 97.79,83.947 97.79,75.057 97.917,74.93 98.044,75.057 101.473,75.057 101.473,78.359 100.711,79.121 98.298,79.121 98.298,82.042 99.06,82.804 119.888,82.804 119.888,79.502
GND/1 on Ground Plane "GND/1_L03_P010" (solid, pour order 10): 72.898,84.455 72.644,84.201 72.644,81.407 69.85,81.407 70.358,80.899 70.358,73.914 75.565,73.914 76.073,73.406 75.819,73.152 75.819,71.755 68.199,71.755 68.453,72.009 68.453,84.328 72.644,84.328 72.771,84.455
GND/1 on Ground Plane "GND/1_L03_P003" (solid, pour order 3): 117.221,115.824 125.412,116.903 116.586,125.73 116.141,126.174 115.57,125.603 68.072,125.603 68.072,125.857 67.945,125.984 67.945,115.697 68.58,115.062 69.342,115.824
no net on Bottom Layer "NONET_L04_P015" (solid, pour order 15): 8.6,125.9
+5V on Power Plane "+5V_L02_P027" (solid, pour order 27): 0,68
+5V on Power Plane "+5V_L02_P026" (solid, pour order 26): 66.8,125.7 68.2,124.3 68.2,105.3 105.5,105.3 119.9,90.9 119.9,85 68,85 67.2,85.8 67.1,85.7 67.1,71.6 75.1,63.6 140,63.6 143.3,60.3 143.8,60.8 151.2,60.8 151.2,13.6 141.9,4.3 141.4,4.8 1.4,4.8 1.4,122.7 4.7,126 67,126 67.9,125.1 67.7,124.9 67.5,124.9

## Keep-outs
Keep-Out Layer:
  lines w0.254: 0,0.2 0,126.9 152.3,126.9 152.3,0.1 0.1,0.1 0,0.2

## Silkscreen, mask and mechanical layers (free items; w line width, h text height)
Top Overlay:
  drawing of 7 lines, arcs and shapes, not listed
  text "Rahul Mallik" at 115.2,112.2 h1.2
  text "MVAC Communication Board V1.0" at 107.075,109.249 h1.2
  text "PS" at 135.7,41.9 h0.7
  text "USB" at 135.5,27.9 h0.7

## Text inside footprints (layer, text, board x,y; h text height)
USB1: Top Overlay "1" at 140.5,33.5 h1.5 r180